# Altium PCB 飞控第二代.PcbDoc (part 1 of 2)
Units mm, origin at the board's own origin, x right, y up, seen from the top; angles counter-clockwise.
Board outline 41.02 x 41.02 mm, 2 copper layers (Top Layer, Bottom Layer); 37 components, 89 nets, 240 pads, 89 vias.
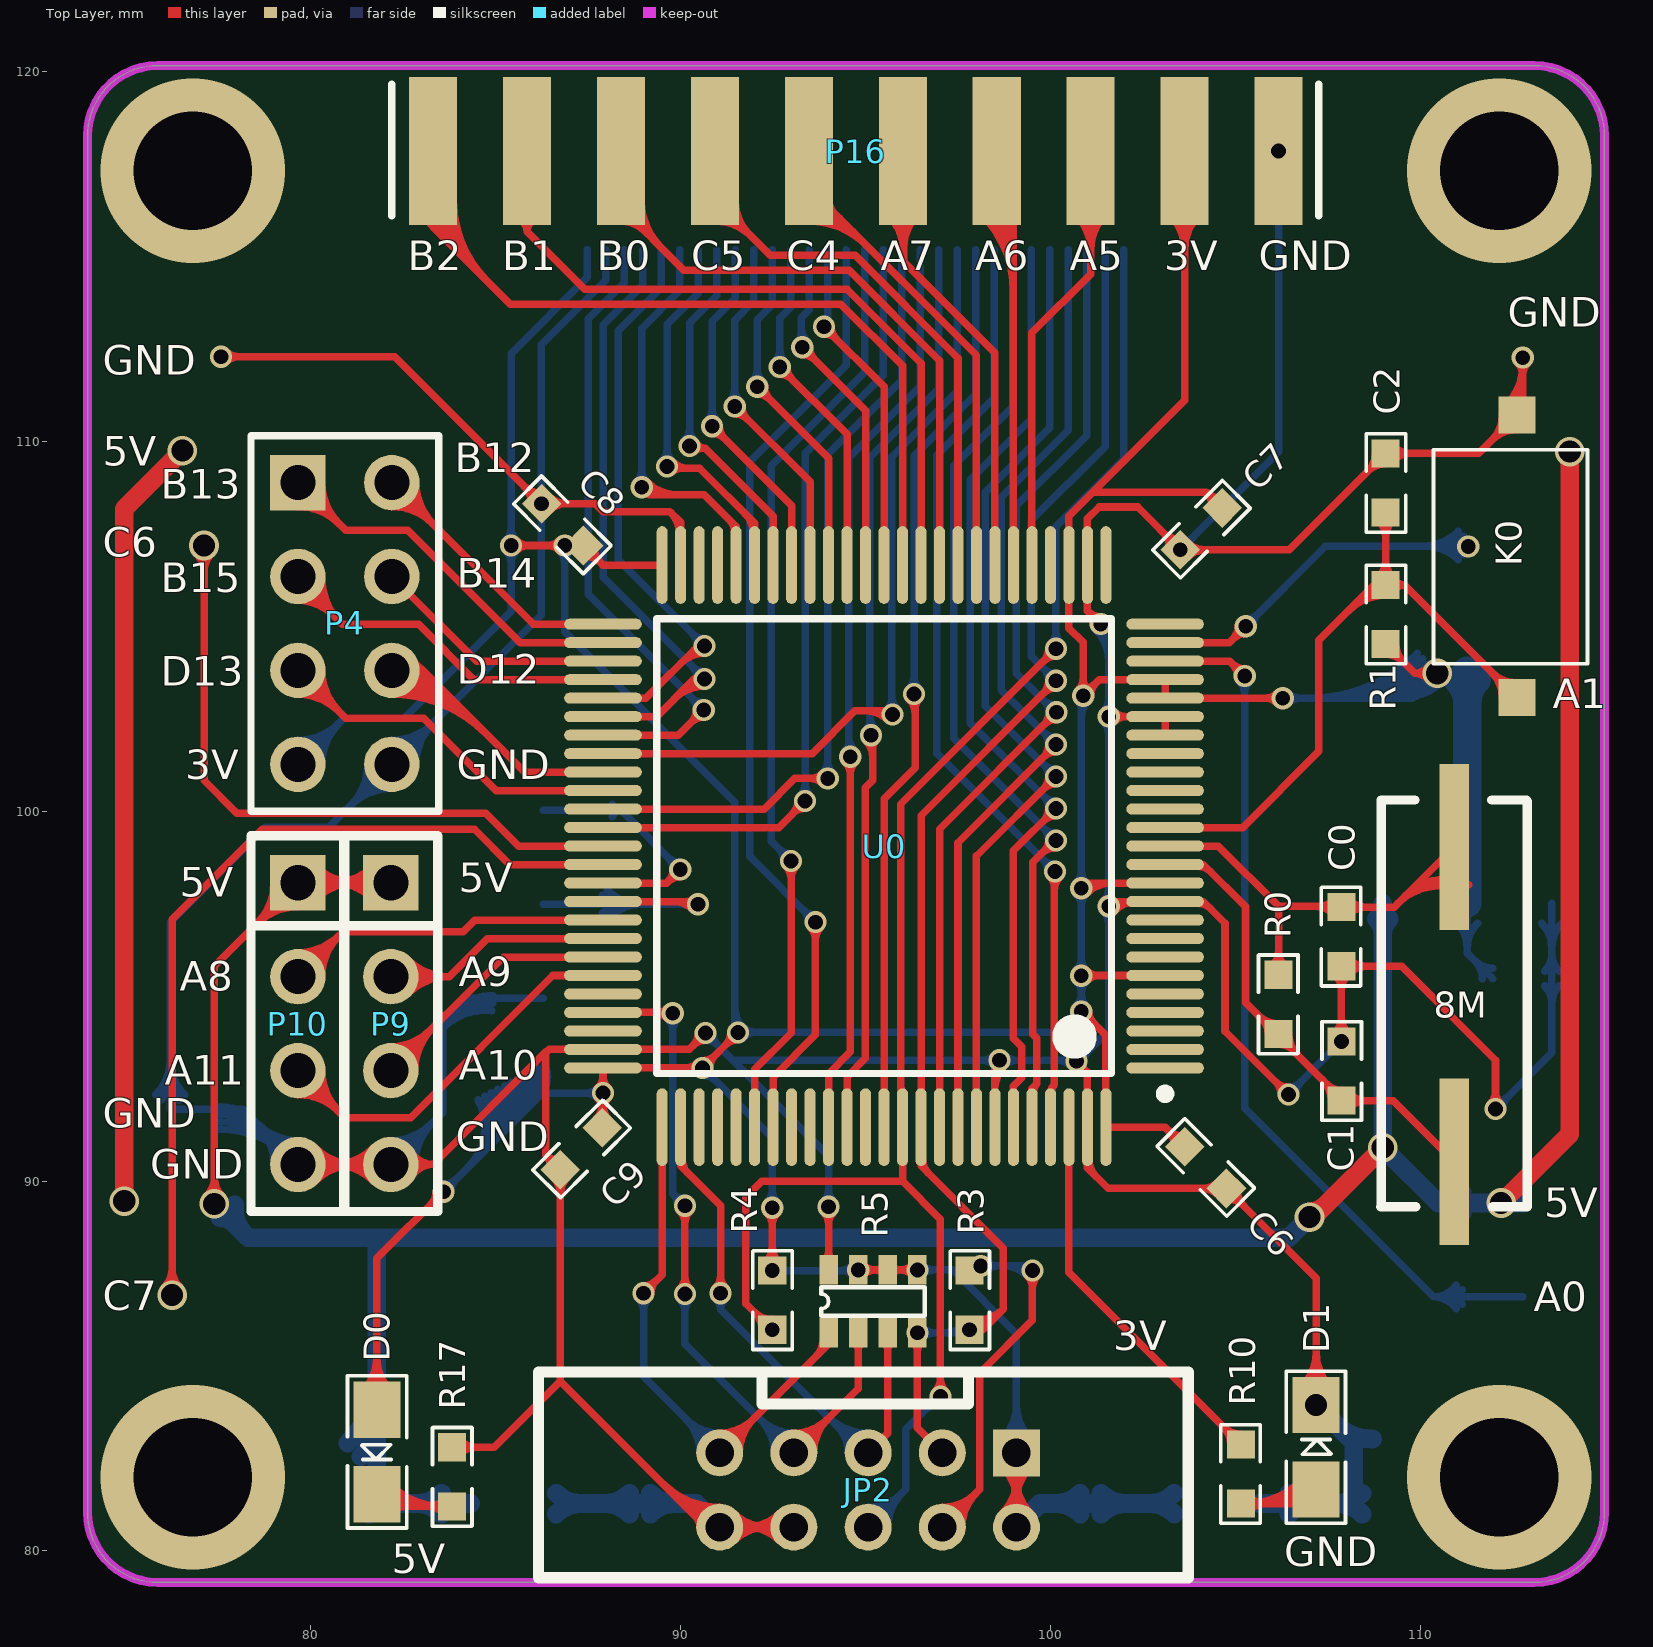
[diagram p0: Top Layer view]
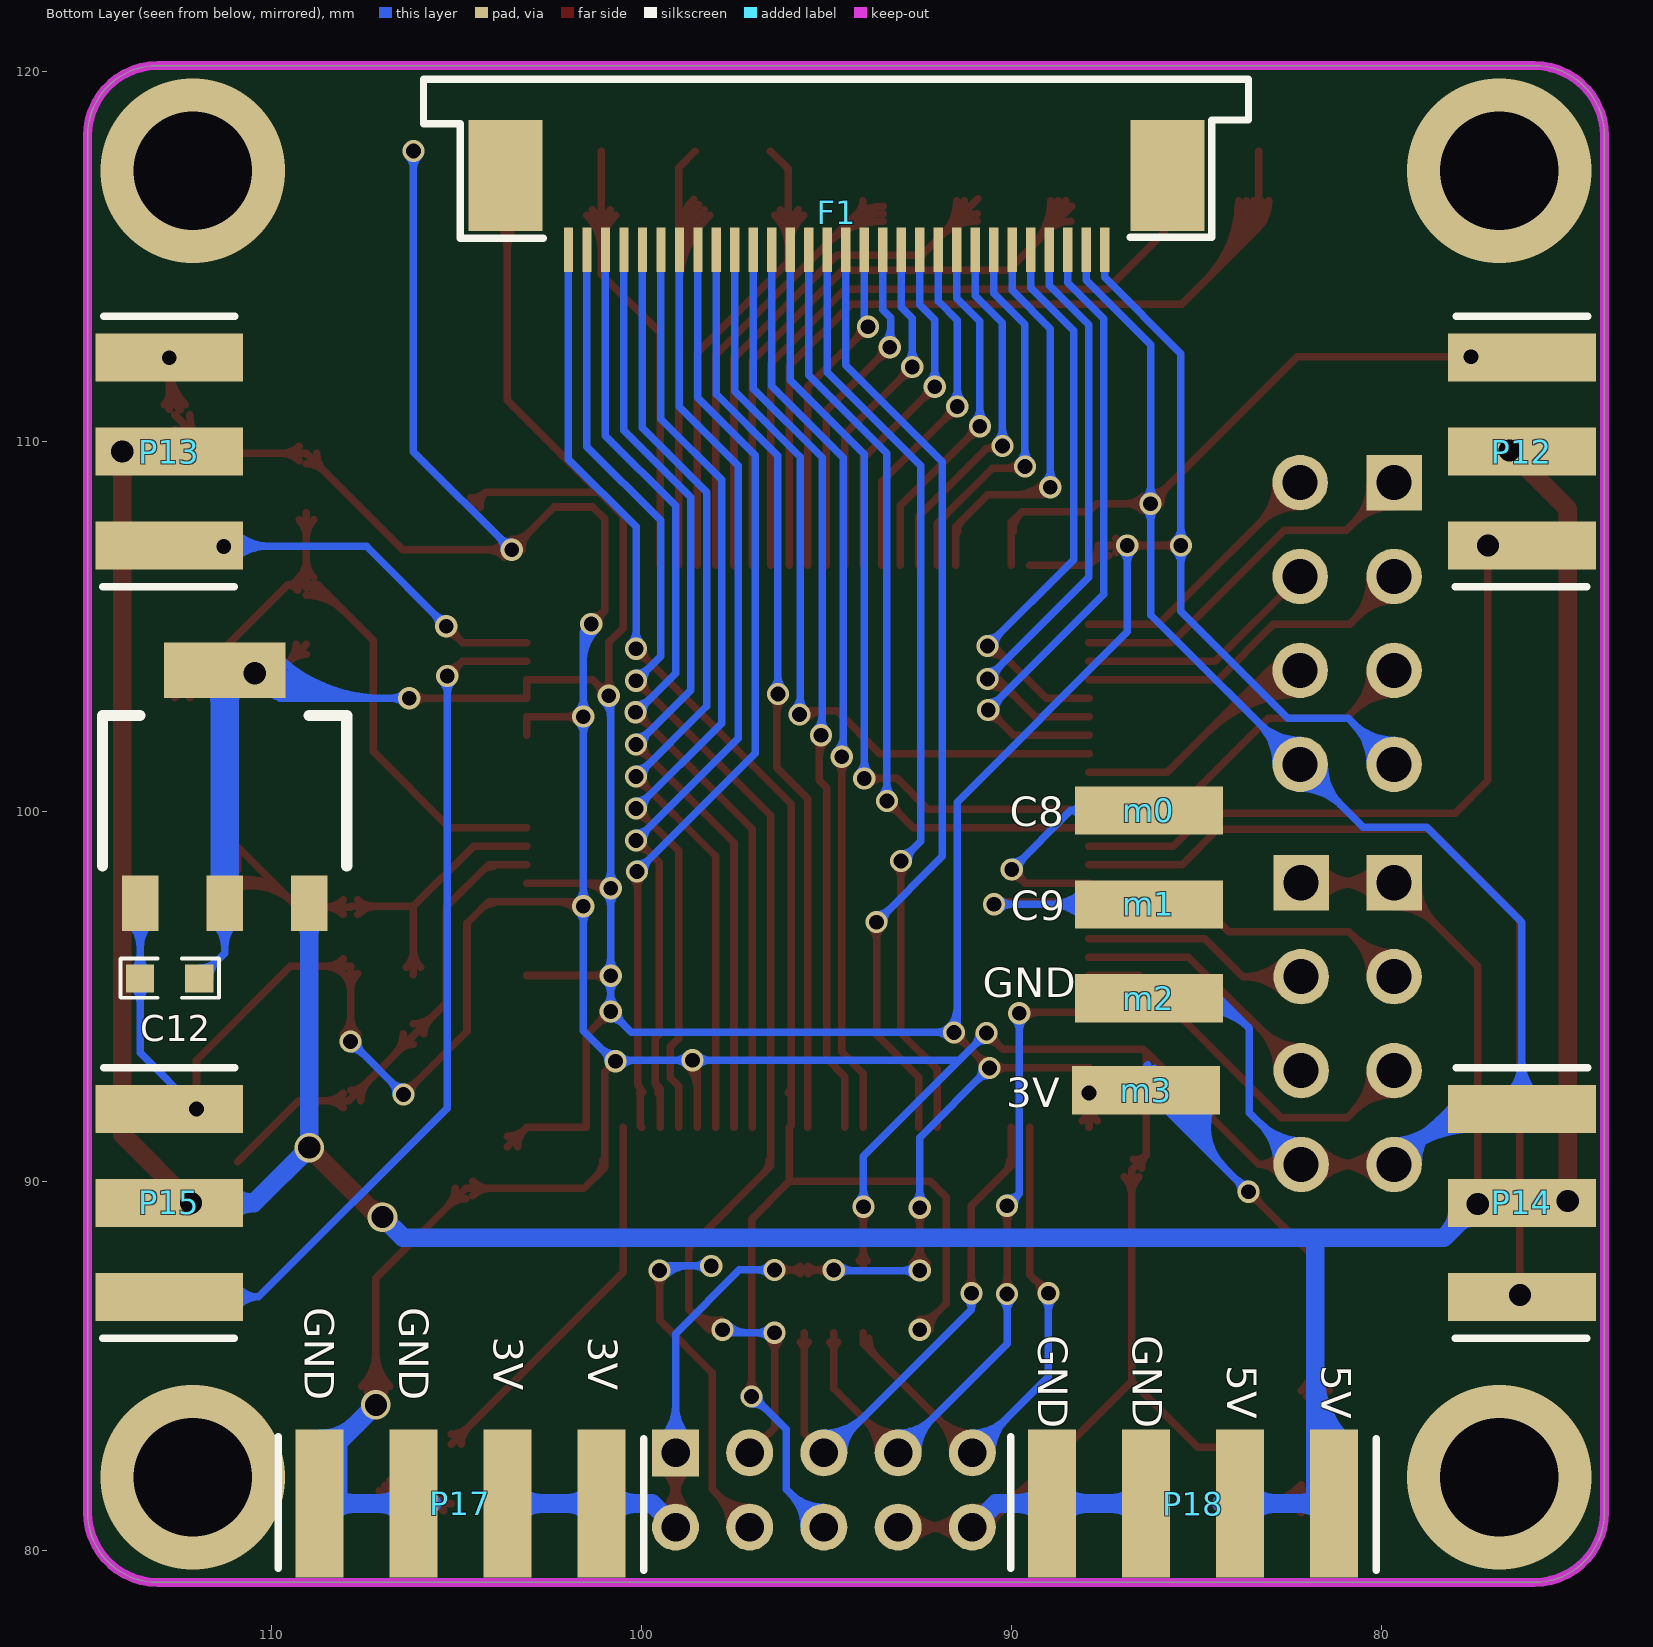
[diagram p1: Bottom Layer view, seen from below]

## Layer stack, top to bottom
Top Layer: signal copper 0.0356
Dielectric: dielectric 0.32, FR-4, Dk 4.8
Bottom Layer: signal copper 0.0356

## Board outline
75.865,79.146 cw(c75.865,81.047) 73.965,81.047 73.965,118.267 cw(c75.865,118.267) 75.865,120.167 113.085,120.167 cw(c113.085,118.267) 114.986,118.267 114.986,81.047 cw(c113.085,81.047) 113.085,79.146

## Design rules (kind name [scope] priority, off if disabled: settings)
Clearance [All] p1: gap=0.2
PolygonConnect [All] p1: connectstyle=Relief reliefconductorwidth=0.254 reliefentries=4 polygonreliefangle="90 Angle"
RoutingVias [All] p1: holewidth=0.4 width=0.6 viastyle="Through Hole" minholewidth=0.3 minwidth=0.5 maxholewidth=5 maxwidth=6
SilkscreenOverComponentPads [All] p1: minsilkscreentomaskgap=0.254
SolderMaskExpansion [All] p1: expansion=0.102
Width [All] p1: maxlimit=1.27 minlimit=0.178 preferedwidth=0.203
27 further rules are at their usual default settings.

## Components (designator, comment, footprint, x,y, rotation, side; value= is the part's Value field where it differs from the comment)
8M "CRY" 晶振-2 110.922,92.253 r90 top
C0 "22p" 0603 107.874,95.809 r90 top
C1 "22p" 0603 107.874,93.777 r270 top
C2 "104" 0603 109.068,109.677 r270 top
C6 "104" 0603 103.632,90.932 r315 top
C7 "104" 0603 104.648,108.204 r225 top
C8 "104" 0603 87.376,107.188 r135 top
C9 "104" 0603 87.884,91.44 r225 top
C12 "104" 0603 113.563,95.479 r180 bottom
D0 "LED" 0805D 81.788,83.82 r270 top
D1 "DODIE" 0805D 107.188,81.661 r90 top
F1 "CON30" FFC_30P_0.5MM 94.488,117.348 r180 bottom
JP2 "Header 2X5" "IDC10L 2.00mm" 99.085,82.652 r180 top
K0 "BUTTON" K1 112.624,103.073 r90 top
m0 "" SIP1-T 86.284,100.025 r90 bottom
m1 "" SIP1-T 86.284,97.485 r90 bottom
m2 "" SIP1-T 86.284,94.945 r90 bottom
m3 "" SIP1-T 86.36,92.456 r90 bottom
P4 "IDC4" IDC4 79.654,108.89 r270 top
P9 "CON4" SIP4 82.167,98.069 r270 top
P10 "CON4" SIP4 79.654,98.069 r270 top
P12 "CON3" SIP3-T0 76.2,107.188 r90 bottom
P13 "CON3" SIP3-T0 112.776,107.188 r90 bottom
P14 "CON3" SIP3-T0 76.2,86.868 r90 bottom
P15 "CON3" SIP3-T0 112.776,86.868 r90 bottom
P16 "CON10" SIP10-T0 83.312,117.856 r0 top
P17 "CON4" SIP4-T0 108.712,81.28 r180 bottom
P18 "CON4" SIP4-T0 88.9,81.28 r180 bottom
R0 "1M" 0603 106.172,93.98 r90 top
R1 "10K" 0603 109.068,106.121 r270 top
R3 "1K" 0603 97.815,87.579 r270 top
R4 "10K" 0603 92.481,87.579 r270 top
R5 "10K" 0603*4 94.005,85.897 r90 top
R10 "Res" 0603 105.156,81.28 r90 top
R17 "1K" 0603 83.82,82.804 r270 top
U0 "STM32F103VCT6" LQFP100 95.504,99.06 r180 top
? "1117" SOT-223 113.563,97.511 r180 bottom

## Footprints (in the part's own frame and the unit in brackets; to place one, negate y for a bottom-side part, rotate by r counter-clockwise, add the part's x,y. Pads: shape width x height; smd on the part's side, far side on the other; paste and mask are expansions set on the pad)
0603 [mil]
  rect 30x30 smd: 1(0,0) 2(63,0)
  silkscreen extent -21,-21 84,21
0603*4 [mm]
  rect 0.8x0.5 smd: 1(0,0) 2(0,-0.8) 3(0,-1.6) 4(0,-2.4) 5(1.7,-2.4) 6(1.7,-1.6) 7(1.7,-0.8) 8(1.7,0)
  silkscreen extent 0.46,-2.6 1.23,0.2
0805D [mil]
  rect 60x50 smd: 1(0,0) 2(90,0)
  silkscreen extent -36,-31 126,32
FFC_30P_0.5MM [mm]
  rect 2x3 smd: 0(-9.193,-0.153) 0(8.707,-0.153)
  rect 0.25x1.2 smd: 1(-7.493,-2.159) 2(-6.993,-2.159) 3(-6.493,-2.159) 4(-5.993,-2.159) 5(-5.493,-2.159) 6(-4.993,-2.159) 7(-4.493,-2.159) 8(-3.993,-2.159) 9(-3.493,-2.159) 10(-2.993,-2.159) 11(-2.493,-2.159) 12(-1.993,-2.159) 13(-1.493,-2.159) 14(-0.993,-2.159) 15(-0.493,-2.159) 16(0.007,-2.159) 17(0.507,-2.159) 18(1.007,-2.159) 19(1.507,-2.159) 20(2.007,-2.159) 21(2.507,-2.159) 22(3.007,-2.159) 23(3.507,-2.159) 24(4.007,-2.159) 25(4.507,-2.159) 26(5.007,-2.159) 27(5.507,-2.16) 28(6.007,-2.16) 29(6.507,-2.16) 30(7.007,-2.16)
  silkscreen extent -11.41,-1.85 10.9,2.44
IDC4 [mm]
  rect 1.5x1.5 hole 0.95: 1(0,0)
  round 1.5 hole 0.95: 2(0,2.54) 3(2.54,0) 4(2.54,2.54) 5(5.08,0) 6(5.08,2.54) 7(7.62,0) 8(7.62,2.54)
  silkscreen extent -1.27,-1.27 8.89,3.81
"IDC10L 2.00mm" [mil]
  rect 50x50 hole 30.32: 1(0,0)
  round 50 hole 30.32: 2(0,79) 3(79,0) 4(79,79) 5(158,0) 6(158,79) 7(237,0) 8(237,79) 9(316,0) 10(316,79)
  silkscreen extent -183,-86 509,133
K1 [mm]
  rect 1x1 smd: 1(0,0) 2(7.645,0)
  silkscreen extent 0.91,-1.91 6.71,2.26
LQFP100 [mm]
  oval 2.1x0.3 smd: 1(-7.6,6) 2(-7.6,5.5) 3(-7.6,5) 4(-7.6,4.5) 5(-7.6,4) 6(-7.6,3.5) 7(-7.6,3) 8(-7.6,2.5) 9(-7.6,2) 10(-7.6,1.5) 11(-7.6,1) 12(-7.6,0.5) 13(-7.6,0) 14(-7.6,-0.5) 15(-7.6,-1) 16(-7.6,-1.5) 17(-7.6,-2) 18(-7.6,-2.5) 19(-7.6,-3) 20(-7.6,-3.5) 21(-7.6,-4) 22(-7.6,-4.5) 23(-7.6,-5) 24(-7.6,-5.5) 25(-7.6,-6) 51(7.6,-6) 52(7.6,-5.5) 53(7.6,-5) 54(7.6,-4.5) 55(7.6,-4) 56(7.6,-3.5) 57(7.6,-3) 58(7.6,-2.5) 59(7.6,-2) 60(7.6,-1.5) 61(7.6,-1) 62(7.6,-0.5) 63(7.6,0) 64(7.6,0.5) 65(7.6,1) 66(7.6,1.5) 67(7.6,2) 68(7.6,2.5) 69(7.6,3) 70(7.6,3.5) 71(7.6,4) 72(7.6,4.5) 73(7.6,5) 74(7.6,5.5) 75(7.6,6)
  oval 0.3x2.1 smd: 26(-6,-7.6) 27(-5.5,-7.6) 28(-5,-7.6) 29(-4.5,-7.6) 30(-4,-7.6) 31(-3.5,-7.6) 32(-3,-7.6) 33(-2.5,-7.6) 34(-2,-7.6) 35(-1.5,-7.6) 36(-1,-7.6) 37(-0.5,-7.6) 38(0,-7.6) 39(0.5,-7.6) 40(1,-7.6) 41(1.5,-7.6) 42(2,-7.6) 43(2.5,-7.6) 44(3,-7.6) 45(3.5,-7.6) 46(4,-7.6) 47(4.5,-7.6) 48(5,-7.6) 49(5.5,-7.6) 50(6,-7.6) 76(6,7.6) 77(5.5,7.6) 78(5,7.6) 79(4.5,7.6) 80(4,7.6) 81(3.5,7.6) 82(3,7.6) 83(2.5,7.6) 84(2,7.6) 85(1.5,7.6) 86(1,7.6) 87(0.5,7.6) 88(0,7.6) 89(-0.5,7.6) 90(-1,7.6) 91(-1.5,7.6) 92(-2,7.6) 93(-2.5,7.6) 94(-3,7.6) 95(-3.5,7.6) 96(-4,7.6) 97(-4.5,7.6) 98(-5,7.6) 99(-5.5,7.6) 100(-6,7.6)
  silkscreen extent -7.73,-6.15 6.15,6.82
SIP1-T [mm]
  rect 1.3x4 smd: 1(0,0)
SIP3-T0 [mm]
  rect 1.3x4 smd: 1(0,0) 2(2.54,0) 3(5.08,0)
  silkscreen extent -1.12,-1.78 6.2,1.8
SIP4 [mm]
  rect 1.5x1.5 hole 0.95: 1(0,0)
  round 1.5 hole 0.95: 2(2.54,0) 3(5.08,0) 4(7.62,0)
  silkscreen extent -1.27,-1.27 8.89,1.27
SIP4-T0 [mm]
  rect 1.3x4 smd: 1(0,0) 2(2.54,0) 3(5.08,0) 4(7.62,0)
  silkscreen extent -1.12,-1.8 8.76,1.8
SIP10-T0 [mm]
  rect 1.3x4 smd: 1(0,0) 2(2.54,0) 3(5.08,0) 4(7.62,0) 5(10.16,0) 6(12.7,0) 7(15.24,0) 8(17.78,0) 9(20.32,0) 10(22.86,0)
  silkscreen extent -1.12,-1.75 23.95,1.8
SOT-223 [mil]
  rect 39x59 smd: 1(0,0) 3(180,0)
  rect 38.98x59.05 smd: 2(90,0)
  rect 129.13x59 smd: 4(90,248.03)
  silkscreen extent -40,40 220,200
晶振-2 [mm] "5.08MM"
  rect 4.5x0.8 smd: 1(-1.727,0) 2(6.782,0)
  silkscreen extent -2.95,-1.98 8.05,1.98

## Part data
C0 C1 C2 C6 C7 C8 C9 C12: library part CAP
D1: library part LED
JP2: library part Header, "Header, 5-Pin, Dual row"
m0 m1 m2 m3: library part CON1
R0 R1 R17: library part RES
R3 R4: library part R
R5: library part RES*4
R10: "Resistor"
U0: "STM32 ARM-based 32-bit MCU with 64 Kbytes Flash, 100-pin LQFP, Industrial Temperature"

## Via types
v1: diameter 0.6, hole 0.4, Top Layer to Bottom Layer, tented both sides, 74 vias
v2: diameter 0.8, hole 0.6, Top Layer to Bottom Layer, tented both sides, 11 vias
v3: diameter 5, hole 3.2, Top Layer to Bottom Layer, 4 vias

## Nets (pads, with @x,y where several pads share a name; then routed paths per layer and width w, separated by ;. In a path a pad name is that pad's centre, name@x,y a point inside that pad or via, vN(x,y) a via of type N, cw(c..) or ccw(c..) an arc to the next point about the centre after c; other vN are vias at no path point)
3.3: ?.2 ?.4 C6.1 C7.1 C8.1 C9.1 C12.2 D0.1 F1.30 JP2.1 JP2.2 m3.1 P4.7 P16.9 P17.3 P17.4 R1.2 R4.1 R5.5 R5.6 R5.7 U0.6 U0.11 U0.21 U0.22 U0.28 U0.50 U0.75 U0.100 | length 247.2
  Top Layer w0.203: D0.1@81.411,84.324 ccw(c80.5,85.235) 81.788,85.235 ccw(c83.076,85.235) D0.1@82.165,84.324 ; D0.1@81.555,84.18 ccw(c80.991,84.744) 81.788,84.744 ccw(c82.585,84.744) D0.1@82.021,84.18 ; D0.1@81.788,83.82 81.788,87.909 v1(83.591,89.713) ; v1@83.393,89.713 cw(c82.914,89.713) 83.253,89.374 cw(c83.591,89.035) v1@83.591,89.514 ; v1(85.42,107.188) C8.1@87.376,107.188 87.904,106.66 U0.50@89.504,106.66 ; v1@85.56,107.048 cw(c85.899,106.709) 85.899,107.188 cw(c85.899,107.667) v1@85.56,107.328 ; v1@86.728,107.048 ccw(c86.389,106.709) 86.389,107.188 ccw(c86.389,107.667) v1@86.728,107.328 ; C8.1@87.008,107.048 cw(c87.347,106.709) 87.347,107.188 cw(c87.347,107.667) C8.1@87.008,107.328 ; C8.1@87.178,106.99 ccw(c86.701,106.513) 86.701,107.188 ccw(c86.701,107.863) C8.1@87.178,107.386 ; C8.1@87.376,106.909 cw(c87.376,106.234) 87.853,106.711 cw(c88.33,107.188) C8.1@87.655,107.188 ; C9.1@87.686,91.638 ccw(c87.161,92.163) v1@87.904,92.163 ; v1@87.764,92.24 cw(c87.425,91.901) 87.904,91.901 cw(c88.383,91.901) v1@88.044,92.24 ; v1@87.764,92.52 ccw(c87.425,92.859) 87.904,92.859 ccw(c88.383,92.859) v1@88.044,92.52 ; C9.1@87.904,91.46 U0.75@87.904,93.06 v1(90.596,93.06) v1(91.554,94.018) ; 87.904,92.066 ccw(c88.51,92.066) C9.1@88.082,91.638 ; v1@90.456,92.92 ccw(c90.117,92.581) 90.117,93.06 ccw(c90.117,93.539) v1@90.456,93.2 ; v1@90.596,93.258 ccw(c90.596,93.737) 90.935,93.399 ccw(c91.274,93.06) v1@90.795,93.06 ; v1@91.356,94.018 cw(c90.877,94.018) 91.216,93.679 cw(c91.554,93.341) v1@91.554,93.82 ; R4.1@92.284,87.777 ccw(c91.807,88.254) 92.481,88.254 ccw(c93.156,88.254) R4.1@92.679,87.777 ; R4.1@92.341,87.719 ccw(c92.002,88.058) 92.481,88.058 ccw(c92.96,88.058) R4.1@92.622,87.719 ; v1@92.341,89.141 cw(c92.002,88.802) 92.481,88.802 cw(c92.96,88.802) v1@92.622,89.141 ; v1(92.481,87.579) v1(92.481,89.281) ; v1(94.805,87.597) v1(96.405,87.597) ; R5.7@94.91,87.492 cw(c95.164,87.239) 95.164,87.597 cw(c95.164,87.955) R5.7@94.91,87.702 ; R5.7@94.946,87.457 cw(c95.284,87.118) 95.284,87.597 cw(c95.284,88.076) R5.7@94.946,87.737 ; R5.6@95.5,87.492 ccw(c95.247,87.239) 95.247,87.597 ccw(c95.247,87.955) R5.6@95.5,87.702 ; R5.6@95.71,87.492 cw(c95.964,87.239) 95.964,87.597 cw(c95.964,87.955) R5.6@95.71,87.702 ; R5.5@96.265,87.457 ccw(c95.926,87.118) 95.926,87.597 ccw(c95.926,88.076) R5.5@96.265,87.737 ; R5.5@96.3,87.492 ccw(c96.047,87.239) 96.047,87.597 ccw(c96.047,87.955) R5.5@96.3,87.702 ; JP2.2@98.708,81.022 ccw(c97.798,81.933) 99.085,81.933 ccw(c100.373,81.933) JP2.2@99.463,81.022 ; JP2.1@98.708,82.274 cw(c97.798,81.364) 99.085,81.364 cw(c100.373,81.364) JP2.1@99.463,82.274 ; JP2.2@98.852,80.878 ccw(c98.288,81.442) 99.085,81.442 ccw(c99.883,81.442) JP2.2@99.319,80.878 ; JP2.1@98.852,82.418 cw(c98.288,81.854) 99.085,81.854 cw(c99.883,81.854) JP2.1@99.319,82.418 ; JP2.2@99.085,80.645 JP2.1@99.085,82.652 ; v1@100.749,103.264 ccw(c100.41,103.603) 100.889,103.603 ccw(c101.368,103.603) v1@101.029,103.264 ; v1@100.833,95.56 U0.6@103.104,95.56 ; v1@100.835,97.92 cw(c101.172,97.583) 101.172,98.06 ; v1@100.838,94.391 cw(c100.838,93.851) 101.22,94.233 ; v1@100.838,94.615 101.504,93.949 U0.100@101.504,91.46 103.104,91.46 C6.1@103.632,90.932 ; v1(100.838,97.917) 100.981,98.06 U0.11@103.104,98.06 ; v1@100.889,103.322 ccw(c100.889,103.801) 101.227,103.463 ccw(c101.566,103.124) v1@101.087,103.124 ; v1@100.978,95.415 cw(c101.33,95.063) 101.33,95.56 ; v1@100.978,95.695 ccw(c101.304,96.021) 101.304,95.56 ; v1@100.978,97.777 cw(c101.662,97.093) 101.662,98.06 ; v1@101.036,94.59 ccw(c101.454,94.59) 101.159,94.294 ; P16.9@103.244,116.118 cw(c102.308,115.182) 103.632,115.182 cw(c104.956,115.182) P16.9@104.02,116.118 ; C6.1@103.353,90.932 ccw(c102.678,90.932) 103.155,91.409 ccw(c103.632,91.886) C6.1@103.632,91.211 ; P16.9@103.388,116.262 cw(c102.799,115.673) 103.632,115.673 cw(c104.465,115.673) P16.9@103.876,116.262 ; P16.9@103.632,117.856 103.632,111.111 101.154,108.633 ; C7.1@104.369,108.226 ccw(c103.853,108.266) 104.219,108.633 ; C7.1@104.626,108.483 cw(c104.586,108.999) 104.219,108.633 ; C7.1@104.648,108.204 104.219,108.633 ; v1@106.147,102.92 ccw(c105.808,102.581) 105.808,103.06 ccw(c105.808,103.539) v1@106.147,103.2 ; v1(106.287,103.06) 105.511,103.06 105.507,103.056 103.108,103.056 U0.21@103.104,103.06 U0.22@103.104,103.56 101.325,103.56 v1(100.889,103.124) 100.889,104.572 100.504,104.957 U0.28@100.504,106.66 100.504,107.983 101.154,108.633 ; R1.2@109.068,104.242 cw(c109.068,103.567) 109.545,104.044 cw(c110.022,104.521) R1.2@109.347,104.521 ; R1.2@109.068,104.521 109.855,103.734 ; v2@110.229,103.551 ccw(c109.855,103.26) 109.855,103.734 ; v2@110.229,103.917 cw(c109.855,104.207) 109.855,103.734 ; v2(110.465,103.734) 109.855,103.734 ; 101.154,108.633 104.219,108.633
  Bottom Layer w0.203: P4.7@79.654,101.27 80.899,102.514 82.525,102.514 85.42,105.41 85.42,112.376 87.481,114.437 F1.30@87.481,115.188 ; P4.7@79.654,101.715 ccw(c79.654,102.79) 80.414,102.03 ccw(c81.174,101.27) P4.7@80.1,101.27 ; P4.7@79.654,101.918 ccw(c79.654,103.484) 80.761,102.377 ccw(c81.868,101.27) P4.7@80.303,101.27 ; v1(83.591,89.713) 86.258,92.38 v1(87.904,92.38) ; v1@83.591,89.911 ccw(c83.591,90.39) 83.93,90.051 ccw(c84.269,89.713) v1@83.79,89.713 ; 84.254,90.375 ccw(c83.158,91.471) m3.1@84.526,92.198 ; 84.448,90.569 ccw(c83.412,91.605) m3.1@84.705,92.294 ; 84.642,90.763 ccw(c83.665,91.74) m3.1@84.885,92.389 ; 84.836,90.957 ccw(c83.918,91.875) m3.1@85.064,92.485 ; 85.03,91.152 ccw(c84.172,92.01) m3.1@85.243,92.58 ; 85.224,91.346 ccw(c84.425,92.145) m3.1@85.423,92.676 ; v1@85.28,107.048 cw(c84.941,106.709) 85.42,106.709 cw(c85.899,106.709) v1@85.56,107.048 ; v1@85.28,107.328 ccw(c84.941,107.667) 85.42,107.667 ccw(c85.899,107.667) v1@85.56,107.328 ; 85.418,91.54 ccw(c84.679,92.28) m3.1@85.602,92.771 ; 85.612,91.734 ccw(c84.932,92.414) m3.1@85.782,92.867 ; m3.1@85.807,91.928 ccw(c85.185,92.549) m3.1@85.961,92.962 ; m3.1@86.001,92.122 ccw(c85.439,92.684) m3.1@86.14,93.058 ; m3.1@86.195,92.316 ccw(c85.692,92.819) 86.32,93.153 ; v1@86.728,107.048 cw(c86.389,106.709) 86.868,106.709 cw(c87.347,106.709) v1@87.008,107.048 ; v1(86.868,107.188) 86.868,104.851 91.469,100.251 91.469,94.104 v1(91.554,94.018) ; m3.1@87.764,92.24 ccw(c87.425,91.901) 87.425,92.38 ccw(c87.425,92.859) m3.1@87.764,92.52 ; v1@90.596,92.862 cw(c90.596,92.383) 90.935,92.721 cw(c91.274,93.06) v1@90.795,93.06 ; v1(90.596,93.06) 92.481,91.175 v1(92.481,89.281) ; 91.469,94.704 ccw(c92.24,94.704) 91.695,94.158 ccw(c92.003,94.466) 92.003,94.031 ; v1@91.554,94.031 100.279,94.031 v1(100.838,94.59) v1(100.838,95.555) v1(100.838,97.917) v1@100.838,103.124 ; v1@91.695,93.878 cw(c92.064,93.508) 92.064,94.031 ; v1@92.341,89.421 ccw(c92.002,89.76) 92.481,89.76 ccw(c92.96,89.76) v1@92.622,89.421 ; v1(92.481,87.579) v1@94.787,87.579 ; v1@92.622,87.439 cw(c92.96,87.1) 92.96,87.579 cw(c92.96,88.058) v1@92.622,87.719 ; 94.283,87.579 ccw(c94.283,88.12) v1@94.665,87.737 ; 94.37,87.579 cw(c94.37,87.162) v1@94.665,87.457 ; v1(96.405,87.597) 97.366,87.597 99.085,85.877 JP2.1@99.085,82.652 ; v1@96.546,87.457 cw(c96.884,87.118) 96.884,87.597 cw(c96.884,88.076) v1@96.546,87.737 ; JP2.1@98.708,83.029 ccw(c97.798,83.939) 99.085,83.939 ccw(c100.373,83.939) JP2.1@99.463,83.029 ; JP2.1@98.852,82.885 ccw(c98.288,83.449) 99.085,83.449 ccw(c99.883,83.449) JP2.1@99.319,82.885 ; v1@100.64,94.59 cw(c100.161,94.59) 100.499,94.251 cw(c100.838,93.912) v1@100.838,94.391 ; v1@100.698,94.73 ccw(c100.359,95.069) 100.838,95.069 ccw(c101.317,95.069) v1@100.978,94.73 ; v1@100.698,95.415 cw(c100.359,95.076) 100.838,95.076 cw(c101.317,95.076) v1@100.978,95.415 ; v1@100.698,95.695 ccw(c100.359,96.034) 100.838,96.034 ccw(c101.317,96.034) v1@100.978,95.695 ; v1@100.698,97.777 cw(c100.359,97.438) 100.838,97.438 cw(c101.317,97.438) v1@100.978,97.777 ; v1@100.698,98.057 ccw(c100.359,98.396) 100.838,98.396 ccw(c101.317,98.396) v1@100.978,98.057 ; v1@100.749,102.984 cw(c100.532,102.768) 100.838,102.768 ; 100.838,102.522 cw(c101.49,102.522) v1@101.029,102.984 ; v1(106.287,103.06) 109.791,103.06 v2(110.465,103.734) ; v1@106.427,102.92 cw(c106.766,102.581) 106.766,103.06 cw(c106.766,103.539) v1@106.427,103.2 ; 107.011,103.06 ccw(c107.011,107.186) ?.4@109.929,104.269 ; 107.501,103.06 ccw(c107.501,106.696) ?.4@110.072,104.125 ; 107.992,103.06 ccw(c107.992,106.205) ?.4@110.216,103.981 ; 108.483,103.06 ccw(c108.483,105.715) ?.4@110.36,103.838 ; 108.973,103.06 ccw(c108.973,105.224) ?.4@110.503,103.694 ; 109.464,103.06 ccw(c109.464,104.734) ?.4@110.647,103.55 ; ?.4@110.166,103.734 cw(c109.446,103.734) 109.955,103.224 cw(c110.465,102.715) ?.4@110.465,103.435 ; ?.2@110.999,96.977 cw(c110.328,96.306) 111.277,96.306 cw(c112.227,96.306) ?.2@111.556,96.977 ; ?.2@111.277,97.511 111.277,96.164 C12.2@111.963,95.479 ; C12.2@111.684,95.479 ccw(c111.009,95.479) 111.486,95.956 ccw(c111.963,96.433) C12.2@111.963,95.758
  Bottom Layer w0.508: JP2.2@99.085,80.645 99.72,81.28 100.584,81.28 P17.3@103.124,81.28 ; P17.4@100.812,81 ccw(c100.136,80.324) 100.136,81.28 ccw(c100.136,82.236) P17.4@100.812,81.56 ; P17.4@101.372,81 cw(c102.048,80.324) 102.048,81.28 cw(c102.048,82.236) P17.4@101.372,81.56 ; P17.3@103.352,81 ccw(c102.676,80.324) 102.676,81.28 ccw(c102.676,82.236) P17.3@103.352,81.56
  Bottom Layer w0.762: ?.4@111.017,103.55 cw(c110.388,102.921) 111.277,102.921 cw(c112.167,102.921) ?.4@111.538,103.55 ; ?.2@111.277,97.511 ?.4@111.277,103.811
+5V: ?.3 P9.1 P10.1 P12.2 P13.2 P14.2 P15.2 P18.3 P18.4 | length 131.7
  Top Layer w0.203: v2@77.183,89.594 ccw(c76.673,90.103) 77.394,90.103 ccw(c78.114,90.103) v2@77.605,89.594 ; v2(77.394,89.383) 77.394,95.809 P10.1@79.654,98.069 P9.1@82.167,98.069 ; P10.1@79.006,98.069 cw(c77.441,98.069) 78.548,96.963 cw(c79.654,95.856) P10.1@79.654,97.421 ; P10.1@79.209,98.069 cw(c78.134,98.069) 78.894,97.309 cw(c79.654,96.549) P10.1@79.654,97.624 ; P10.1@79.969,97.755 cw(c80.729,96.995) 80.729,98.069 cw(c80.729,99.144) P10.1@79.969,98.384 ; P10.1@80.113,97.611 cw(c81.22,96.504) 81.22,98.069 cw(c81.22,99.635) P10.1@80.113,98.528 ; P9.1@81.709,97.611 ccw(c80.602,96.504) 80.602,98.069 ccw(c80.602,99.635) P9.1@81.709,98.528 ; P9.1@81.853,97.755 ccw(c81.093,96.995) 81.093,98.069 ccw(c81.093,99.144) P9.1@81.853,98.384
  Top Layer w0.508: v2(74.955,89.459) 74.955,108.179 v2(76.53,109.753) ; v2@107.01,89.173 ccw(c107.01,89.771) 107.433,89.348 ; v2@107.112,89.027 v2(108.991,90.907) ; v2(112.192,89.408) 114.046,91.262 v2(114.046,109.728)
  Bottom Layer w0.508: v2(77.394,89.383) 78.308,88.468 106.451,88.468 v2(107.01,89.027) ; P14.2@77.55,89.012 cw(c77.55,88.494) P14.2@77.916,88.86 ; P14.2@77.943,89.359 ccw(c78.898,89.239) 78.217,88.559 ; P18.4@81,82.91 ccw(c79.098,84.812) 81.788,84.812 ; P18.4@81.359,82.551 ccw(c80.324,83.586) 81.788,83.586 ; P18.4@81.56,81 cw(c82.236,80.324) 82.236,81.28 cw(c82.236,82.236) P18.4@81.56,81.56 ; 81.788,88.443 81.788,81.28 P18.3@84.328,81.28 ; P18.3@83.54,81 ccw(c82.864,80.324) 82.864,81.28 ccw(c82.864,82.236) P18.3@83.54,81.56 ; ?.3@108.821,97.086 cw(c108.409,96.674) 108.991,96.674 cw(c109.574,96.674) ?.3@109.162,97.086 ; ?.3@108.991,97.511 v2(108.991,90.907) 110.49,89.408 ; P15.2@111.142,89.132 ccw(c110.49,88.5) 110.49,89.408 ; P15.2@111.142,89.684 cw(c110.49,90.316) 110.49,89.408 ; P15.2@112.776,89.408 110.49,89.408
GND: ?.1 C0.1 C1.1 C2.1 C6.2 C7.2 C8.2 C9.2 C12.1 D1.2 F1.29 JP2.8 JP2.10 K0.2 m2.1 P4.8 P9.4 P10.4 P12.3 P13.3 P14.3 P15.3 P16.10 P17.1 P17.2 P18.1 P18.2 R5.8 R17.1 U0.10 U0.19 U0.20 U0.27 U0.49 U0.74 U0.94 U0.99 | length 316.3
  Top Layer w0.203: v1(77.572,112.293) 82.271,112.293 v1(86.244,108.32) ; v1@77.712,112.153 cw(c78.051,111.814) 78.051,112.293 cw(c78.051,112.772) v1@77.712,112.434 ; P10.4@79.654,90.449 P9.4@82.167,90.449 83.312,90.449 ; P10.4@79.969,90.135 cw(c80.729,89.375) 80.729,90.449 cw(c80.729,91.524) P10.4@79.969,90.764 ; P10.4@80.113,89.991 cw(c81.22,88.884) 81.22,90.449 cw(c81.22,92.015) P10.4@80.113,90.908 ; P9.4@81.709,89.991 ccw(c80.602,88.884) 80.602,90.449 ccw(c80.602,92.015) P9.4@81.709,90.908 ; P9.4@81.853,90.135 ccw(c81.093,89.375) 81.093,90.449 ccw(c81.093,91.524) P9.4@81.853,90.764 ; P9.4@82.549,90.221 cw(c82.953,89.978) 82.953,90.449 cw(c82.953,90.92) P9.4@82.549,90.678 ; P9.4@82.724,90.116 cw(c83.312,89.763) 83.312,90.449 ; P9.4@82.724,90.783 ccw(c83.312,91.135) 83.312,90.449 ; R17.1@83.82,82.804 84.963,82.804 86.752,84.593 ; R17.1@84.018,82.606 cw(c84.495,82.129) 84.495,82.804 cw(c84.495,83.479) R17.1@84.018,83.002 ; C8.2@85.965,108.32 ccw(c85.291,108.32) 85.768,108.796 ccw(c86.244,109.273) C8.2@86.244,108.599 ; C8.2@86.046,108.32 ccw(c85.567,108.32) 85.906,108.658 ccw(c86.244,108.997) C8.2@86.244,108.518 ; 86.36,93.472 86.448,93.56 U0.74@87.904,93.56 90.233,93.56 v1(90.678,94.005) ; C8.2@86.385,108.179 cw(c86.723,107.841) 86.723,108.32 cw(c86.723,108.798) C8.2@86.385,108.46 ; C8.2@86.408,108.483 v1(86.244,108.32) ; C8.2@86.442,108.122 cw(c86.919,107.645) 86.919,108.32 cw(c86.919,108.994) C8.2@86.442,108.517 ; C9.2@86.476,90.349 ccw(c86.069,90.41) 86.36,90.701 ; C9.2@86.555,90.111 cw(c86.078,89.634) 86.752,89.634 cw(c87.427,89.634) C9.2@86.95,90.111 ; C9.2@86.711,90.585 cw(c86.651,90.992) 86.36,90.701 ; 89.537,81.809 ccw(c91.059,83.331) JP2.10@91.059,81.178 ; 89.744,108.071 cw(c89.232,107.56) U0.49@89.956,107.56 ; 89.884,81.462 ccw(c91.059,82.637) JP2.10@91.059,80.975 ; U0.49@90.004,106.66 90.004,107.811 89.713,108.102 87.909,108.102 87.692,108.32 v1(86.244,108.32) ; 90.231,81.115 ccw(c91.059,81.943) JP2.10@91.059,80.772 ; 90.402,80.944 cw(c90.102,80.645) JP2.10@90.526,80.645 ; v1@90.48,94.005 cw(c90.001,94.005) 90.339,93.667 cw(c90.678,93.328) v1@90.678,93.807 ; JP2.10@91.292,80.412 cw(c91.856,79.848) 91.856,80.645 cw(c91.856,81.442) JP2.10@91.292,80.878 ; JP2.10@91.436,80.268 cw(c92.347,79.357) 92.347,80.645 cw(c92.347,81.933) JP2.10@91.436,81.022 ; JP2.8@92.688,80.268 ccw(c91.778,79.357) 91.778,80.645 ccw(c91.778,81.933) JP2.8@92.688,81.022 ; JP2.8@92.832,80.412 ccw(c92.268,79.848) 92.268,80.645 ccw(c92.268,81.442) JP2.8@92.832,80.878 ; JP2.8@93.066,80.645 JP2.10@91.059,80.645 90.701,80.645 86.752,84.593 ; v1@93.865,89.166 cw(c93.526,88.827) 94.005,88.827 cw(c94.484,88.827) v1@94.146,89.166 ; R5.8@93.9,87.852 ccw(c93.647,88.105) 94.005,88.105 ccw(c94.364,88.105) R5.8@94.11,87.852 ; R5.8@94.005,87.597 v1(94.005,89.306) ; U0.94@98.504,91.46 v1@98.504,93.145 ; U0.94@98.504,92.49 cw(c99.407,92.49) v1@98.768,93.129 ; 98.504,92.981 cw(c98.916,92.981) v1@98.625,93.272 ; v1(100.711,93.243) 101.004,92.95 U0.99@101.004,91.46 101.004,90.36 101.563,89.8 C6.2@104.764,89.8 107.188,87.376 v2(107.188,83.947) ; U0.99@101.052,90.56 ccw(c101.653,90.56) 101.228,90.135 ; v1@101.166,105.061 ccw(c100.687,105.061) 101.026,105.4 ccw(c101.364,105.739) v1@101.364,105.26 ; v1(101.364,105.061) 101.004,105.422 U0.27@101.004,106.66 101.004,107.913 101.321,108.229 102.36,108.229 v1(103.516,107.072) 106.463,107.072 C2.1@109.068,109.677 111.582,109.677 K0.2@112.624,110.719 ; v1@101.576,97.438 cw(c101.871,97.143) 101.871,97.56 ; v1(101.58,102.56) U0.20@103.104,102.56 U0.19@103.104,102.06 ; v1@101.705,97.56 U0.10@103.104,97.56 104.143,97.56 104.724,96.978 104.724,94.056 v1(106.439,92.342) ; v1@101.72,97.294 cw(c102.362,96.652) U0.10@102.362,97.56 ; v1@101.72,102.42 cw(c102.059,102.081) 102.059,102.56 cw(c102.059,103.039) v1@101.72,102.7 ; C7.2@103.237,107.072 ccw(c102.563,107.072) 103.04,107.549 ccw(c103.516,108.026) C7.2@103.516,107.352 ; C7.2@103.318,107.072 ccw(c102.839,107.072) 103.178,107.411 ccw(c103.516,107.75) C7.2@103.516,107.271 ; C7.2@103.657,106.932 cw(c103.995,106.594) 103.995,107.072 cw(c103.995,107.551) C7.2@103.657,107.213 ; C7.2@103.714,106.875 cw(c104.191,106.398) 104.191,107.072 cw(c104.191,107.747) C7.2@103.714,107.27 ; U0.10@104.004,97.512 cw(c104.004,97.06) 104.323,97.379 ; C6.2@104.566,89.603 ccw(c104.089,89.126) 104.089,89.8 ccw(c104.089,90.475) C6.2@104.566,89.998 ; C6.2@104.764,89.521 cw(c104.764,88.847) 105.24,89.324 cw(c105.717,89.8) C6.2@105.043,89.8 ; v1@106.24,92.342 ccw(c105.761,92.342) 106.1,92.68 ccw(c106.439,93.019) v1@106.439,92.54 ; D1.2@106.811,84.451 ccw(c105.9,85.362) 107.188,85.362 ccw(c108.476,85.362) D1.2@107.565,84.451 ; D1.2@106.955,84.307 ccw(c106.391,84.871) 107.188,84.871 ccw(c107.985,84.871) D1.2@107.421,84.307 ; D1.2@106.977,84.158 ccw(c106.468,84.667) 107.188,84.667 ccw(c107.908,84.667) D1.2@107.399,84.158 ; C1.1@107.676,93.974 ccw(c107.199,94.451) 107.874,94.451 ccw(c108.548,94.451) C1.1@108.071,93.974 ; C0.1@107.676,95.611 cw(c107.199,95.134) 107.874,95.134 cw(c108.548,95.134) 108.071,95.611 cw(c108.548,95.134) 108.548,95.809 cw(c108.548,96.483) C0.1@108.071,96.006 ; C1.1@107.734,93.917 ccw(c107.395,94.256) 107.874,94.256 ccw(c108.353,94.256) C1.1@108.014,93.917 ; v1(107.874,93.777) C0.1@107.874,95.809 109.499,95.809 112.039,93.269 v1(112.039,91.948) ; C2.1@108.788,109.677 cw(c108.114,109.677) 108.591,109.2 cw(c109.068,108.723) C2.1@109.068,109.398 ; C2.1@109.265,109.48 cw(c109.742,109.003) 109.742,109.677 cw(c109.742,110.352) C2.1@109.265,109.875 ; v1@111.899,92.088 ccw(c111.56,92.427) 112.039,92.427 ccw(c112.518,92.427) v1@112.18,92.088 ; K0.2@112.225,110.719 cw(c111.263,110.719) 111.943,110.038 cw(c112.624,109.358) K0.2@112.624,110.32 ; K0.2@112.342,111 ccw(c111.294,112.048) v1@112.776,112.048 ; K0.2@112.486,110.857 ccw(c111.784,111.558) 112.776,111.558 ; v1@112.636,112.128 cw(c112.297,111.789) 112.776,111.789 cw(c113.255,111.789) v1@112.916,112.128 ; K0.2@112.776,110.871 v1(112.776,112.268) ; 112.776,111.312 ccw(c113.217,111.312) K0.2@112.905,111 ; 83.312,90.449 86.36,93.497 86.36,90.701 ; 86.36,90.701 C9.2@86.752,90.308 86.752,84.593
  Bottom Layer w0.203: P14.3@75.812,92.336 ccw(c74.876,93.272) 76.2,93.272 ccw(c77.524,93.272) P14.3@76.588,92.336 ; P14.3@75.956,92.192 ccw(c75.367,92.781) 76.2,92.781 ccw(c77.033,92.781) P14.3@76.444,92.192 ; P14.3@77.55,91.4 cw(c77.55,88.613) P10.4@79.52,90.583 ; P14.3@77.55,91.603 cw(c77.55,89.307) P10.4@79.173,90.93 ; P14.3@77.55,91.806 cw(c77.55,90.001) 78.827,91.277 ; P14.3@77.55,92.009 cw(c77.55,90.694) 78.48,91.624 ; P10.4@79.006,90.449 ccw(c77.441,90.449) 78.548,91.556 ccw(c79.654,92.663) P10.4@79.654,91.098 ; P10.4@79.209,90.449 ccw(c78.134,90.449) 78.894,91.209 ccw(c79.654,91.969) P10.4@79.654,90.895 ; P10.4@79.654,90.449 78.156,91.948 P14.3@76.2,91.948 76.2,97.003 78.765,99.568 80.493,99.568 P4.8@82.194,101.27 86.233,105.308 86.233,112.618 87.981,114.366 F1.29@87.981,115.188 ; P4.8@81.546,101.27 cw(c79.981,101.27) 81.088,100.163 cw(c82.194,99.056) P4.8@82.194,100.621 ; P4.8@81.749,101.27 cw(c80.674,101.27) 81.434,100.51 cw(c82.194,99.75) P4.8@82.194,100.825 ; P9.4@82.167,90.449 83.566,91.848 83.566,94.132 84.379,94.945 m2.1@86.284,94.945 ; P9.4@82.167,90.895 ccw(c82.167,91.969) 82.927,91.209 ccw(c83.687,90.449) P9.4@82.613,90.449 ; P9.4@82.167,91.098 ccw(c82.167,92.663) 83.274,91.556 ccw(c84.381,90.449) P9.4@82.816,90.449 ; P4.8@82.194,101.715 ccw(c82.194,102.79) 82.954,102.03 ccw(c83.714,101.27) P4.8@82.64,101.27 ; P4.8@82.194,101.918 ccw(c82.194,103.484) 83.301,102.377 ccw(c84.408,101.27) P4.8@82.843,101.27 ; 83.584,94.15 cw(c84.703,93.031) m2.1@84.892,94.602 ; 83.879,94.446 cw(c84.767,93.559) m2.1@84.917,94.804 ; 84.175,94.741 cw(c84.83,94.086) m2.1@84.941,95.006 ; v1@86.104,108.179 cw(c85.793,107.868) 86.233,107.868 ; v1@86.104,108.46 ccw(c85.793,108.771) 86.233,108.771 ; 86.233,107.813 cw(c86.751,107.813) v1@86.385,108.179 ; 86.233,108.826 ccw(c86.751,108.826) v1@86.385,108.46 ; v1@90.678,93.807 cw(c90.678,93.328) 91.017,93.667 cw(c91.355,94.005) v1@90.876,94.005 ; v1(90.678,94.005) 91.415,93.269 ; v1@93.865,89.447 ccw(c93.526,89.785) 94.005,89.785 ccw(c94.484,89.785) v1@94.146,89.447 ; v1(94.005,89.306) 94.005,90.678 91.415,93.269 ; v1@98.488,93.129 ccw(c98.149,92.79) 98.149,93.269 ccw(c98.149,93.748) v1@98.488,93.409 ; v1@98.768,93.129 cw(c99.107,92.79) 99.107,93.269 cw(c99.107,93.748) v1@98.768,93.409 ; 100.171,93.269 cw(c100.171,92.703) v1@100.571,93.103 ; 100.293,93.269 ccw(c100.293,93.661) v1@100.571,93.384 ; v1@100.711,93.442 ccw(c100.711,94.043) 101.136,93.618 ; v1@100.909,93.243 cw(c101.266,93.243) 101.014,93.495 ; v1@101.224,104.921 cw(c100.365,104.062) 101.58,104.062 ; v1(101.364,105.061) 101.58,104.846 v1(101.58,102.56) v1(101.58,97.434) 101.58,94.061 100.787,93.269 v1(98.628,93.269) 91.415,93.269 ; v1@101.368,105.065 cw(c100.856,104.553) 101.58,104.553 ; v1@101.44,97.294 cw(c101.101,96.955) 101.58,96.955 cw(c102.059,96.955) v1@101.72,97.294 ; v1@101.44,97.575 ccw(c101.101,97.913) 101.58,97.913 ccw(c102.059,97.913) v1@101.72,97.575 ; v1@101.44,102.42 cw(c101.101,102.081) 101.58,102.081 cw(c102.059,102.081) v1@101.72,102.42 ; v1@101.44,102.7 ccw(c101.101,103.039) 101.58,103.039 ccw(c102.059,103.039) v1@101.72,102.7 ; v1(103.516,107.072) 106.172,109.728 v1(106.172,117.856) ; v1@103.516,107.271 ccw(c103.516,107.75) 103.855,107.411 ccw(c104.194,107.072) v1@103.715,107.072 ; v1@106.032,117.716 cw(c105.693,117.377) 106.172,117.377 cw(c106.651,117.377) v1@106.312,117.716 ; v1(106.439,92.342) v1(107.874,93.777) ; v1@106.439,92.54 ccw(c106.439,93.019) 106.777,92.68 ccw(c107.116,92.342) v1@106.637,92.342 ; v1@107.675,93.777 cw(c107.196,93.777) 107.535,93.438 cw(c107.874,93.099) v1@107.874,93.578 ; v1(112.039,91.948) 113.563,93.472 C12.1@113.563,95.479 ?.1@113.563,97.511 ; P15.3@112.039,92.146 ccw(c112.039,92.625) 112.378,92.287 ccw(c112.717,91.948) P15.3@112.238,91.948 ; ?.1@113.285,96.978 cw(c112.613,96.306) 113.563,96.306 cw(c114.514,96.306) ?.1@113.842,96.978 ; C12.1@113.366,95.281 cw(c112.889,94.804) 113.563,94.804 cw(c114.238,94.804) C12.1@113.761,95.281 ; C12.1@113.366,95.676 ccw(c112.889,96.153) 113.563,96.153 ccw(c114.238,96.153) C12.1@113.761,95.676
  Bottom Layer w0.508: P18.2@86.64,81 cw(c87.316,80.324) 87.316,81.28 cw(c87.316,82.236) P18.2@86.64,81.56 ; P18.2@86.868,81.28 89.408,81.28 90.424,81.28 JP2.10@91.059,80.645 ; P18.1@88.62,81 ccw(c87.944,80.324) 87.944,81.28 ccw(c87.944,82.236) P18.1@88.62,81.56 ; P18.1@89.18,81 cw(c89.856,80.324) 89.856,81.28 cw(c89.856,82.236) P18.1@89.18,81.56 ; P17.2@105.664,81.28 108.204,81.28 108.204,82.931 v2(107.188,83.947) ; P17.2@106.452,81 cw(c107.128,80.324) 107.128,81.28 cw(c107.128,82.236) P17.2@106.452,81.56 ; 107.683,83.452 ccw(c108.712,84.482) P17.1@108.712,83.026 ; P17.1@108.432,81 ccw(c107.756,80.324) 107.756,81.28 ccw(c107.756,82.236) P17.1@108.432,81.56
Net8M_1: 8M.1 C1.2 R0.1 U0.12 | length 17.3
  Top Layer w0.203: U0.12@103.104,98.56 104.143,98.56 105.283,97.42 105.283,94.818 107.925,92.177 109.271,92.177 8M.1@110.922,90.526 ; U0.12@104.004,98.512 cw(c104.004,98.06) 104.323,98.379 ; 105.608,94.493 ccw(c106.172,95.057) R0.1@106.172,94.259 ; 105.731,94.37 cw(c105.341,93.98) R0.1@105.893,93.98 ; R0.1@106.172,93.701 cw(c106.172,93.149) 106.562,93.539 ; R0.1@106.451,93.98 ccw(c107.249,93.98) 106.685,93.416 ; 107.361,92.74 cw(c106.797,92.177) C1.2@107.594,92.177 ; 107.484,92.618 ccw(c107.874,93.008) C1.2@107.874,92.456 ; C1.2@108.071,91.979 cw(c108.548,91.502) 108.548,92.177 cw(c108.548,92.851) C1.2@108.071,92.374
Net8M_2: 8M.2 C0.2 R0.2 U0.13 | length 18.6
  Top Layer w0.203: U0.13@103.104,99.06 104.546,99.06 106.172,97.434 ; R0.2@105.974,95.778 ccw(c105.497,96.255) 106.172,96.255 ccw(c106.847,96.255) R0.2@106.37,95.778 ; R0.2@106.172,95.58 106.172,97.434 ; 107.138,97.434 cw(c107.138,96.673) C0.2@107.676,97.211 ; 107.261,97.434 ccw(c107.261,98.022) C0.2@107.676,97.607 ; C0.2@107.848,97.434 106.172,97.434 ; C0.2@107.874,97.409 109.296,97.409 8M.2@110.922,99.035 8M.2@110.922,98.425 ; C0.2@108.071,97.211 cw(c108.548,96.734) 108.548,97.409 cw(c108.548,98.084) C0.2@108.071,97.607 ; 109.399,97.512 cw(c110.543,96.368) 8M.2@111.224,97.836 ; 109.605,97.718 cw(c110.673,96.649) 8M.2@111.309,98.02
NetC2_2: C2.2 K0.1 R1.1 U0.14 | length 23.3
  Top Layer w0.203: U0.14@103.104,99.56 105.199,99.56 107.264,101.625 107.264,104.623 108.763,106.121 109.576,106.121 ; 108.07,105.429 cw(c109.068,104.431) R1.1@109.068,105.842 ; 108.417,105.776 cw(c109.068,105.125) R1.1@109.068,106.045 ; R1.1@108.87,106.319 ccw(c108.393,106.796) 109.068,106.796 ccw(c109.742,106.796) R1.1@109.265,106.319 ; C2.2@108.87,107.879 cw(c108.393,107.402) 109.068,107.402 cw(c109.742,107.402) C2.2@109.265,107.879 ; R1.1@109.068,106.121 C2.2@109.068,108.077 ; R1.1@109.304,105.972 cw(c109.576,105.799) 109.576,106.121 ; R1.1@109.304,106.271 ccw(c109.576,106.443) 109.576,106.121 ; K0.1@112.225,103.073 ccw(c111.263,103.073) 111.943,103.753 ccw(c112.624,104.433) K0.1@112.624,103.472 ; K0.1@112.624,103.073 109.576,106.121
NetD0_2: D0.2 R17.2 | length 6.7
  Top Layer w0.203: D0.2@81.878,81.497 ccw(c82.585,82.204) 82.585,81.204 ccw(c82.585,80.61) D0.2@82.165,81.03 ; D0.2@82.021,81.64 ccw(c83.076,82.695) 83.076,81.204 ; D0.2@82.118,81.204 R17.2@83.82,81.204 ; D0.2@82.165,81.784 ccw(c83.566,83.185) R17.2@83.566,81.204 ; R17.2@83.622,81.006 ccw(c83.145,80.529) 83.145,81.204 ccw(c83.145,81.878) R17.2@83.622,81.401